# Altium PCB PCB2.PcbDoc
Units mm, origin at the board's own origin, x right, y up, seen from the top; angles counter-clockwise.
Board outline 83.06 x 84.33 mm, 2 copper layers (Top Layer, Bottom Layer); 15 components, 21 nets, 99 pads, 6 vias.
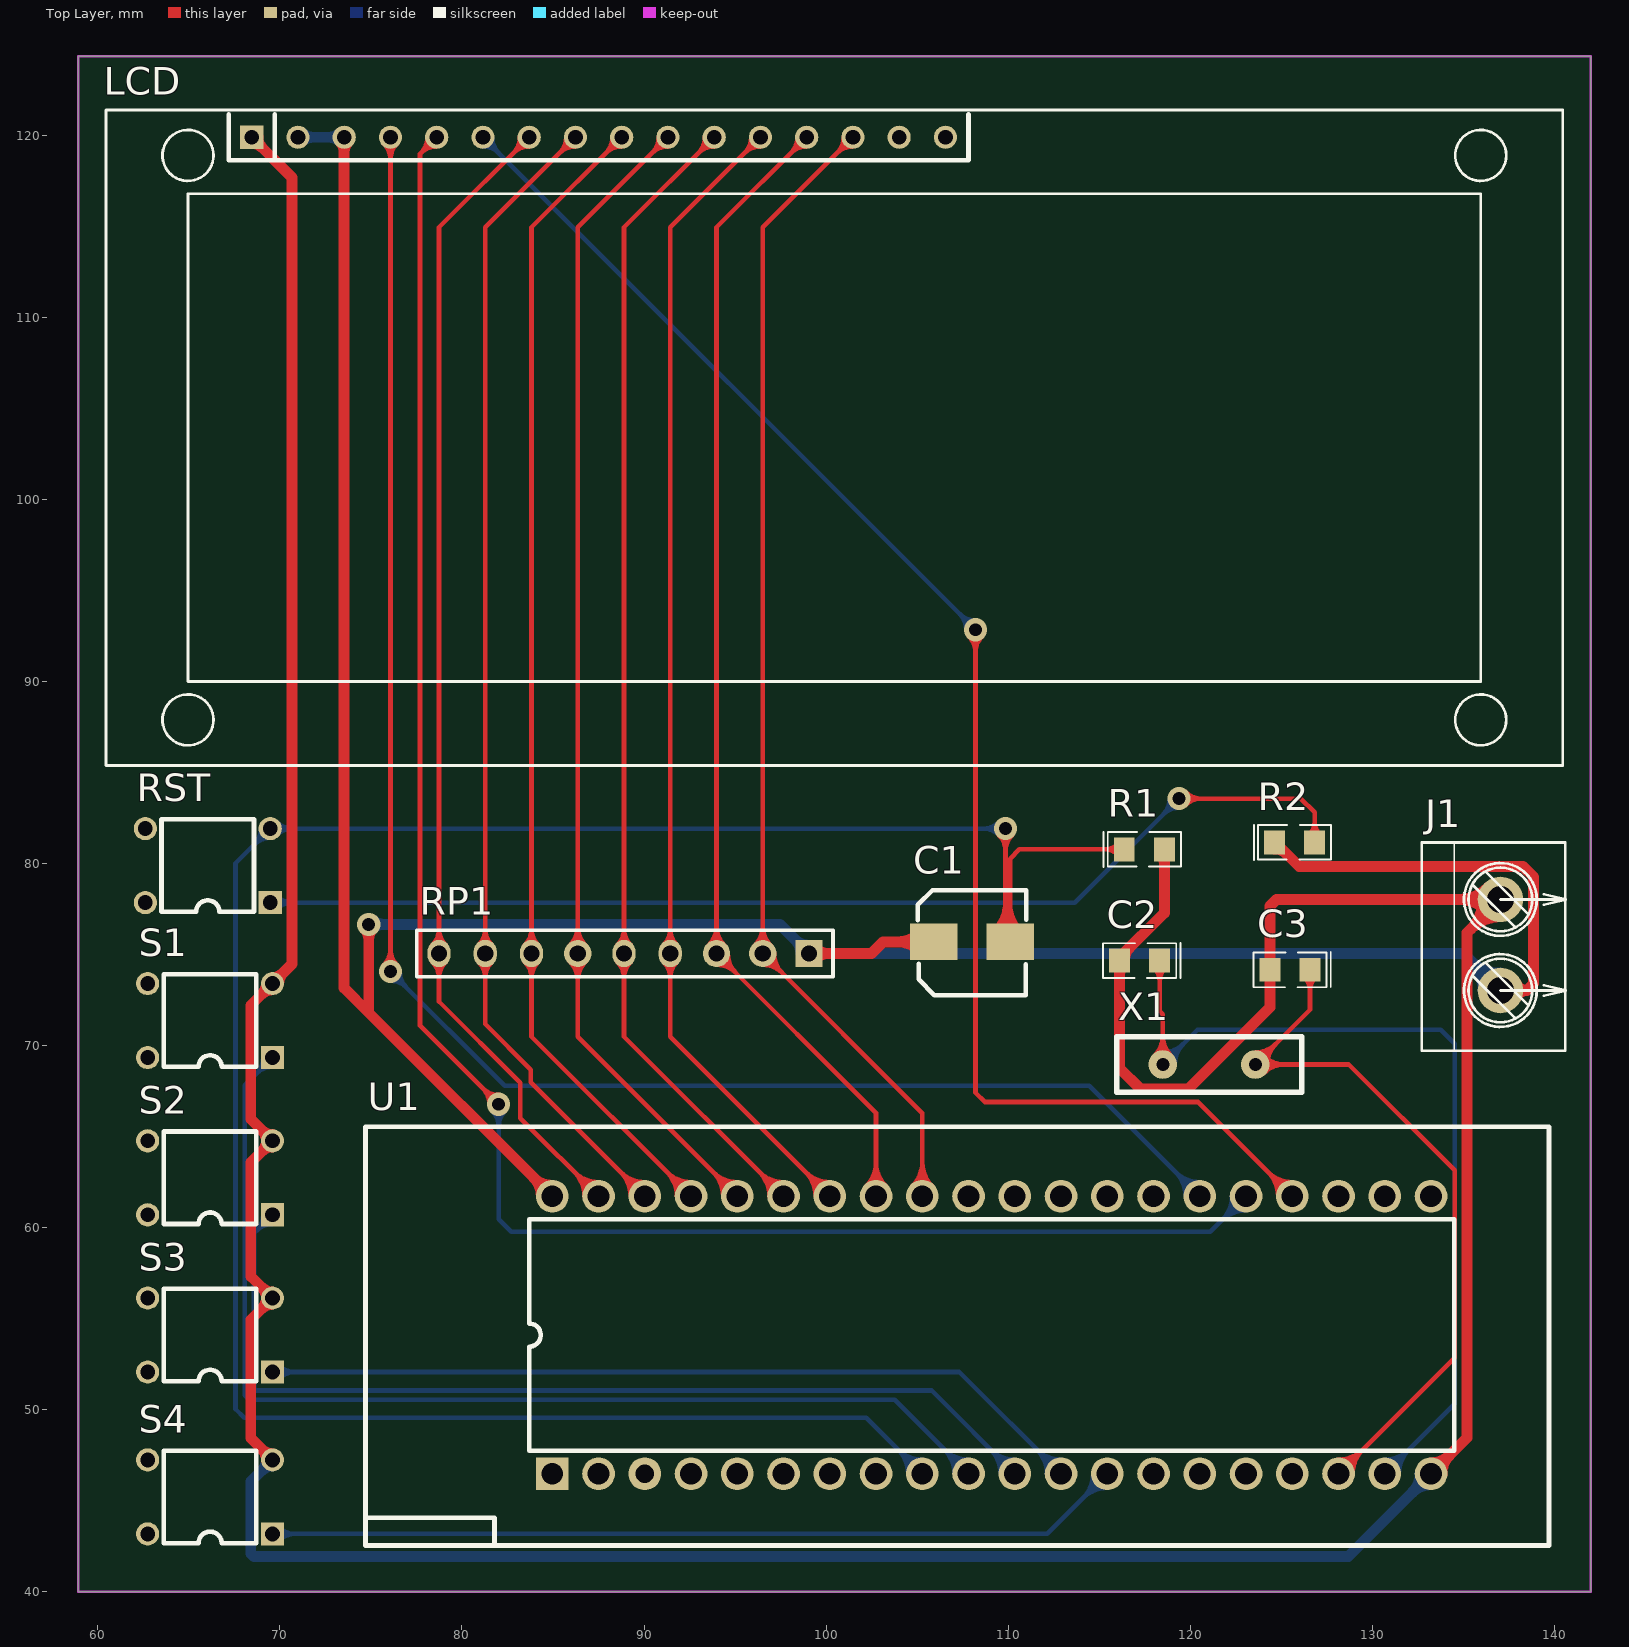
[diagram p0: Top Layer view]
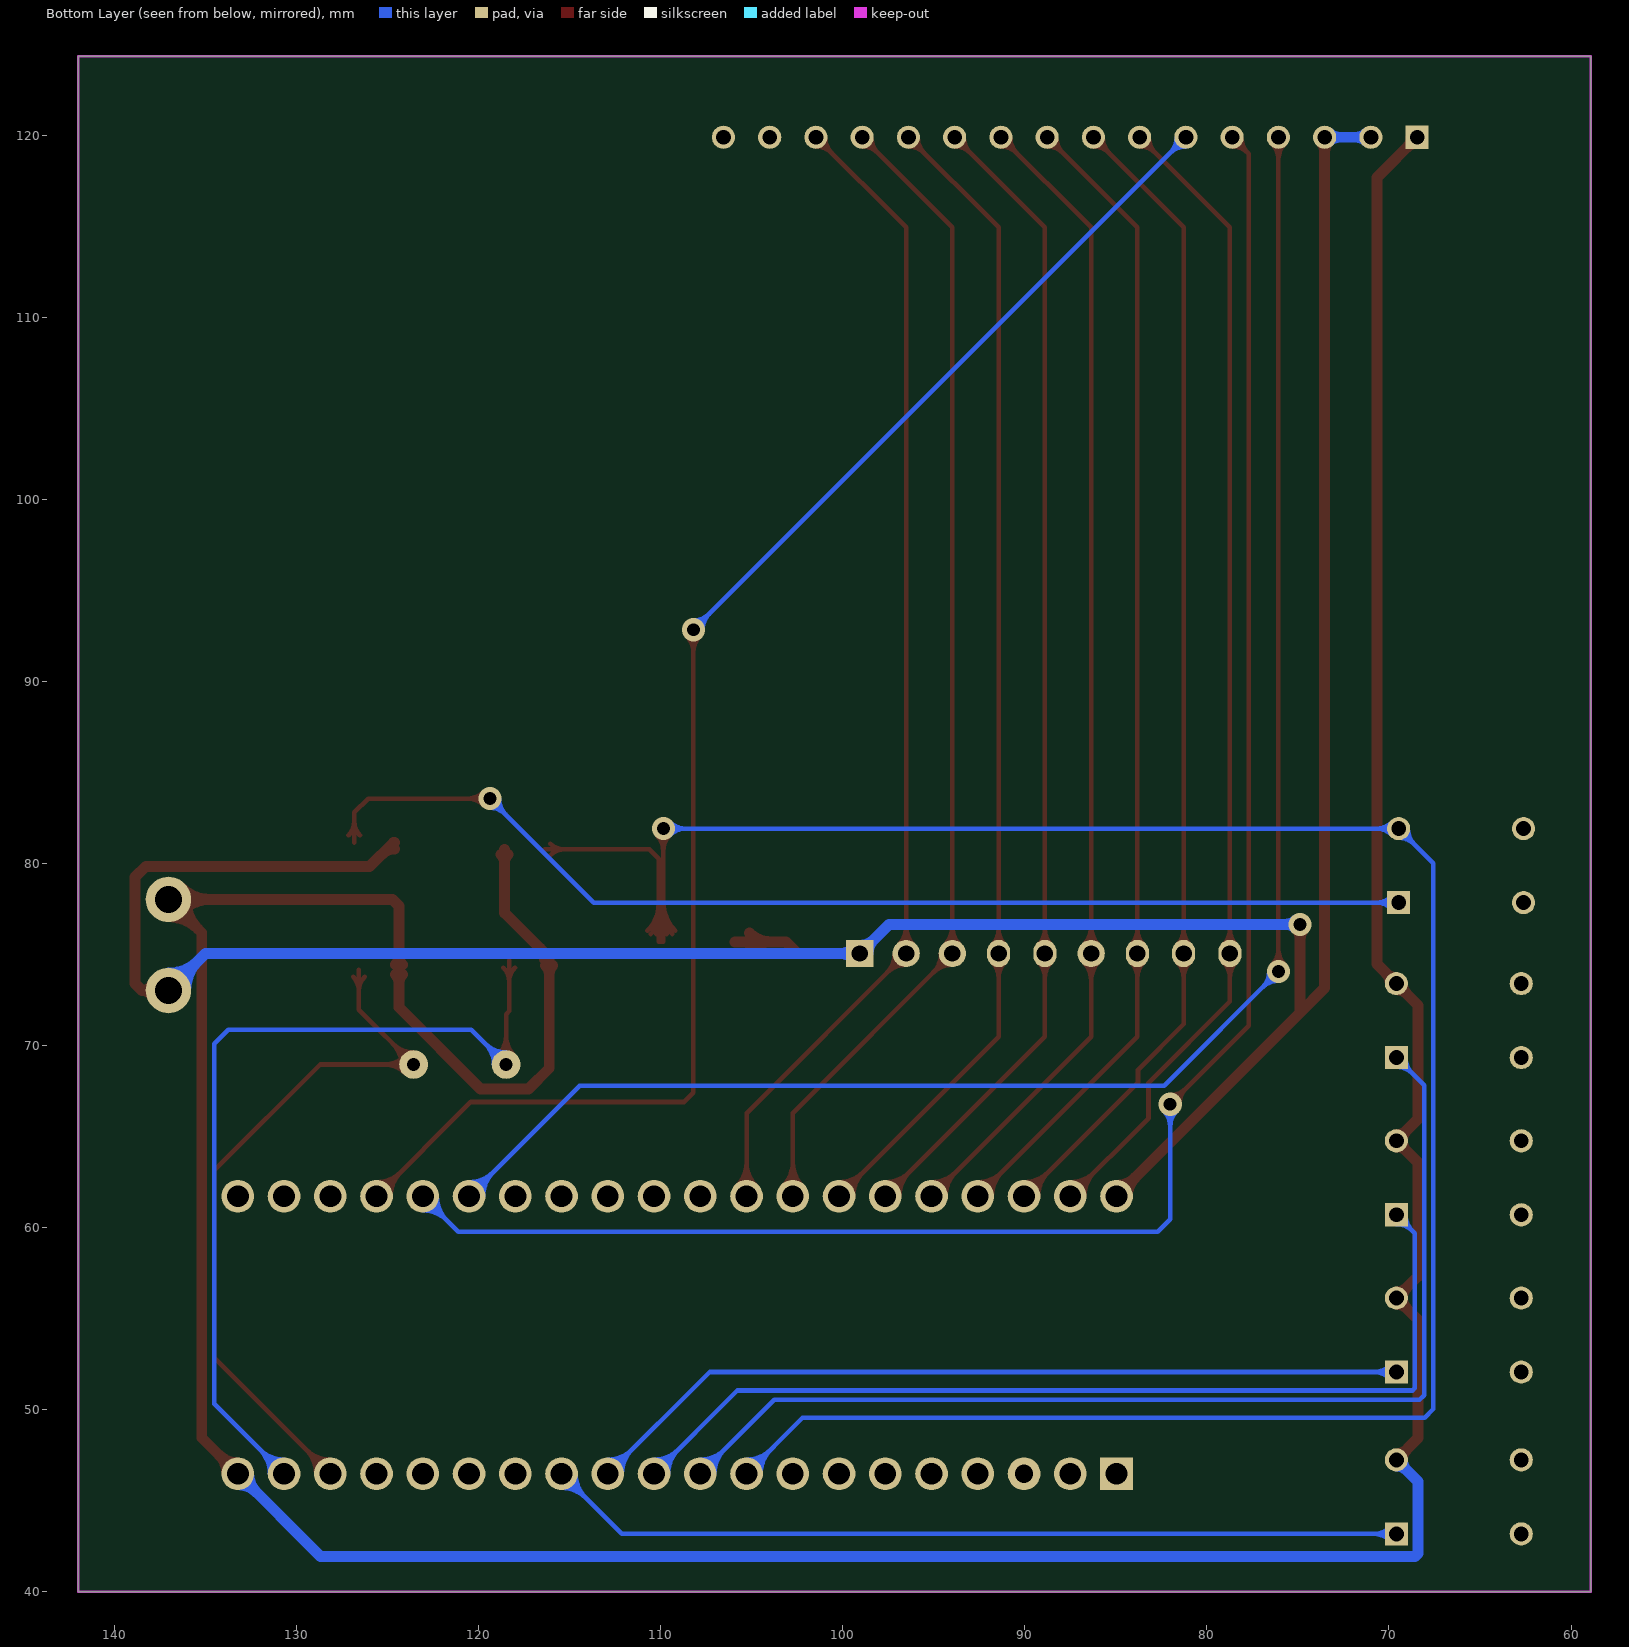
[diagram p1: Bottom Layer view, seen from below]
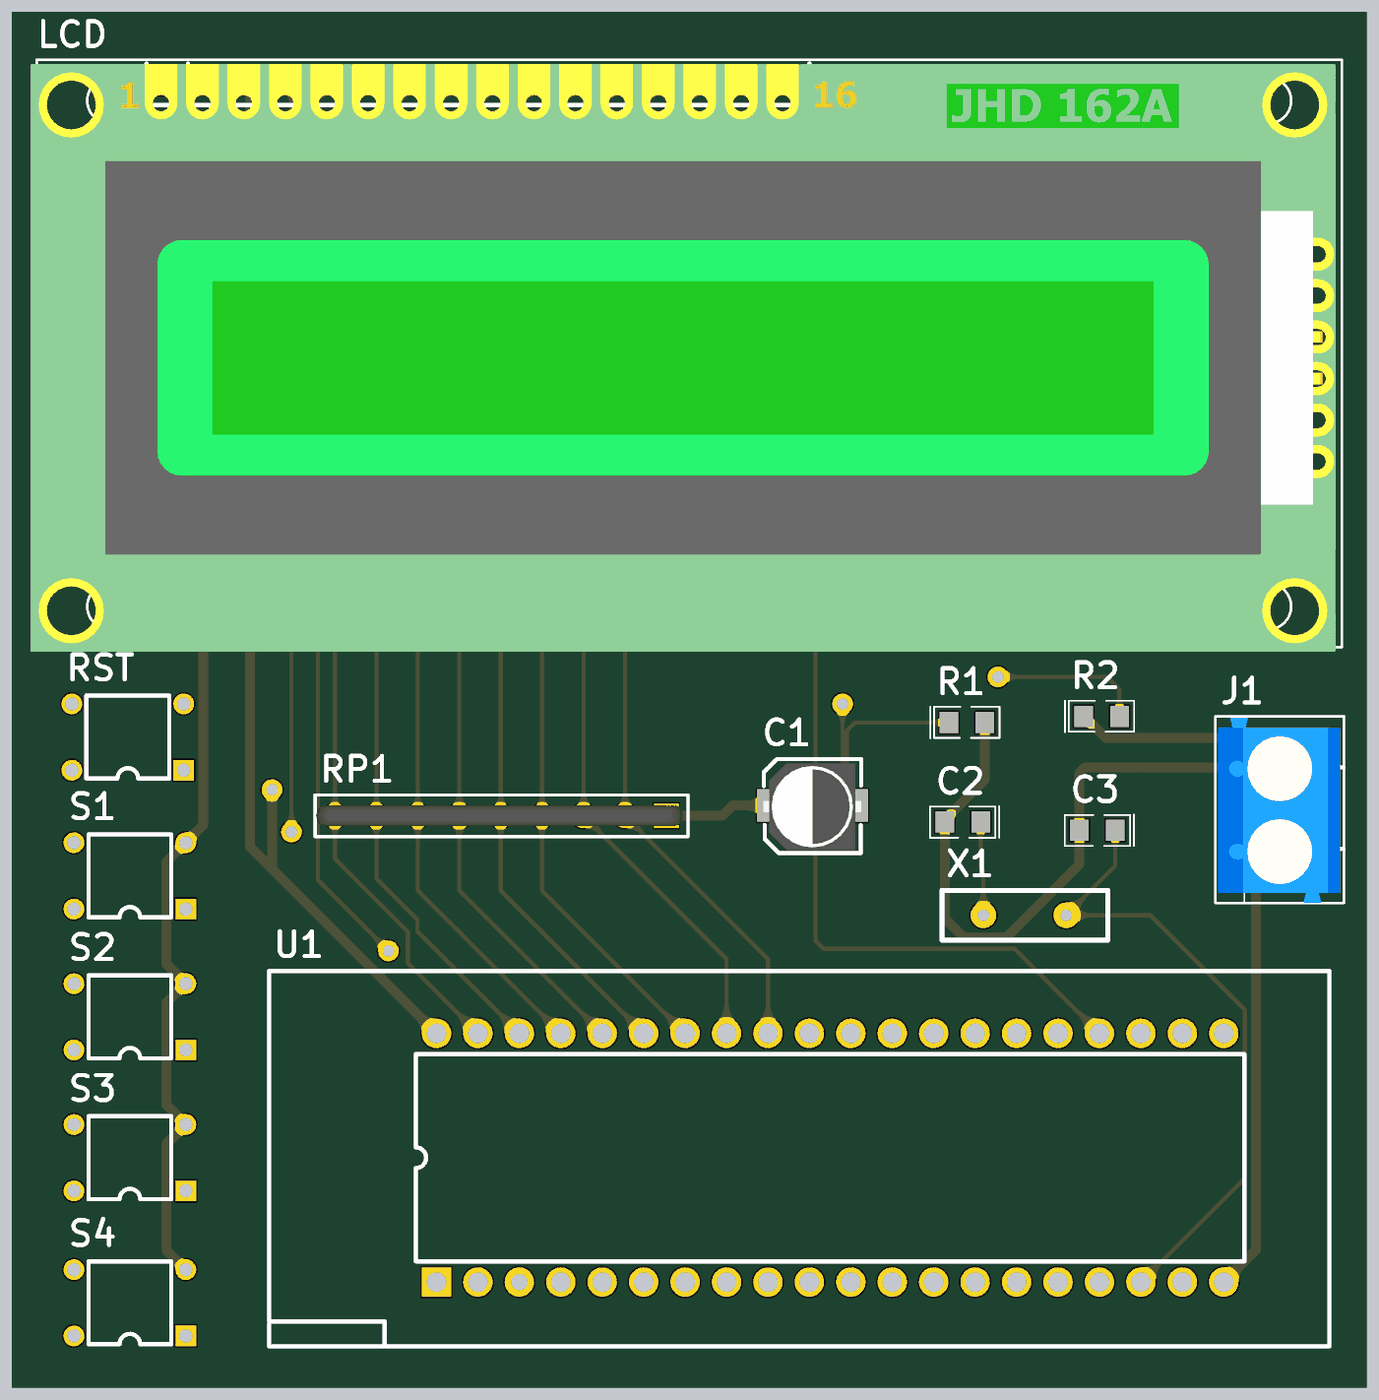
[diagram p2: 3D render of the assembled board from above, using the file's embedded part models]

## Layer stack, top to bottom
Top Solder: solder mask 0.0102, Solder Resist, Dk 3.5
Top Layer: signal copper 0.0356
Dielectric 1: dielectric 0.32, FR-4, Dk 4.8
Bottom Layer: signal copper 0.0356
Bottom Solder: solder mask 0.0102, Solder Resist, Dk 3.5

## Board outline
58.928,40.005 58.928,124.333 141.986,124.333 141.986,40.005

## Design rules (kind name [scope] priority, off if disabled: settings)
Clearance [All] p1: gap=0.254
PolygonConnect [All] p1: connectstyle=Relief reliefconductorwidth=0.254 reliefentries=4 polygonreliefangle="90 Angle" airgapwidth=0.254
RoutingVias [All] p1: holewidth=0.711 width=1.27 viastyle="Through Hole" minholewidth=0.711 minwidth=1.27 maxholewidth=0.711 maxwidth=1.27
SolderMaskExpansion [All] p1: expansion=0.102
Width Width_1 [InNetClass('New Class 1')] p1: maxlimit=0.254 minlimit=0.254 preferedwidth=0.254
Width [InNetClass('New Class')] p2: maxlimit=0.6 minlimit=0.254 preferedwidth=0.6
29 further rules are at their usual default settings.

## Classes and differential pairs
net class "New Class": GND VCC
net class "New Class 1": D0 D1 D2 D3 D4 D5 D6 D7 EN NetC1_2 NetC2_1 NetC3_1 NetR2_2 P30 P31 P32 P33 RS WR

## Components (designator, comment, footprint, x,y, rotation, side; value= is the part's Value field where it differs from the comment)
C1 "10uf" C_SMT-5*5 105.918,75.692 r0 top
C2 "30" C0805 117.221,74.676 r180 top
C3 "30" C0805 125.476,74.168 r180 top
J1 "CON2" TC2 137.033,73.025 r90 top
LCD "1602" LCD1602 68.453,119.888 r0 top
R1 "10K" C0805 117.475,80.772 r0 top
R2 "10K" C0805 125.73,81.153 r0 top
RP1 "103" R-9PIN 99.06,75.057 r180 top
RST "SW-PB" ANJIAN 66.04,77.343 r180 top
S1 "SW-PB" ANJIAN 66.167,68.834 r180 top
S2 "SW-PB" ANJIAN 66.167,60.198 r180 top
S3 "SW-PB" ANJIAN 66.167,51.562 r180 top
S4 "SW-PB" ANJIAN 66.167,42.672 r180 top
U1 "AT89C52" JINSUOZUO 139.7,42.545 r90 top
X1 "12MHz" XTAL1 118.491,68.961 r0 top

## Footprints (in the part's own frame and the unit in brackets; to place one, negate y for a bottom-side part, rotate by r counter-clockwise, add the part's x,y. Pads: shape width x height; smd on the part's side, far side on the other; paste and mask are expansions set on the pad)
ANJIAN [mil]
  rect 50x50 hole 32: 1(-135,-20)
  round 50 hole 32: 2(-135,-180) 3(135,-180) 4(135,-20)
  silkscreen extent -100,-200 100,0
C0805 [mm]
  rect 1.15x1.3 smd: 1(-1.1,0) 2(1.1,0)
  silkscreen extent -2.24,-0.97 2.01,0.97, body extent -0.97,-0.61 1.03,0.6, height 0.5
C_SMT-5*5 [mm] "贴片铝电解电容 5*5   22uf"
  rect 2.6x2 smd: 1(0,0) 2(4.191,0)
  silkscreen extent -0.89,-2.92 5.08,2.84, body extent -0.92,-2.73 5.08,2.57, height 5.9
JINSUOZUO [mm]
  rect 1.8x1.8 hole 1.2: 1(3.937,54.737)
  round 1.8 hole 1.2: 2(3.937,52.197) 4(3.937,47.117) 5(3.937,44.577) 6(3.937,42.037) 7(3.937,39.497) 8(3.937,36.957) 9(3.937,34.417) 10(3.937,31.877) 11(3.937,29.337) 12(3.937,26.797) 13(3.937,24.257) 14(3.937,21.717) 15(3.937,19.177) 16(3.937,16.637) 17(3.937,14.097) 18(3.937,11.557) 19(3.937,9.017) 20(3.937,6.477) 21(19.177,6.477) 22(19.177,9.017) 23(19.177,11.557) 24(19.177,14.097) 25(19.177,16.637) 26(19.177,19.177) 27(19.177,21.717) 28(19.177,24.257) 29(19.177,26.797) 30(19.177,29.337) 31(19.177,31.877) 32(19.177,34.417) 33(19.177,36.957) 34(19.177,39.497) 35(19.177,42.037) 36(19.177,44.577) 37(19.177,47.117) 38(19.177,49.657) 39(19.177,52.197) 40(19.177,54.737)
  round 1.8 hole 1: 3(3.937,49.657)
  silkscreen extent 0,0 23,65
LCD1602 [mil]
  rect 50x50 hole 32: 1(0,0)
  round 50 hole 32: 2(100,0) 3(200,0) 4(300,0) 5(400,0) 6(500,0) 7(600,0) 8(700,0) 9(800,0) 10(900,0) 11(1000,0) 12(1100,0) 13(1200,0) 14(1300,0) 15(1400,0) 16(1500,0)
  silkscreen extent -315,-1358 2835,59, body extent -330,-1369 2820,49, height 417
R-9PIN [mm]
  rect 1.5x1.5 hole 0.9: 1(0,0)
  round 1.5 hole 0.9: 2(2.54,0) 3(5.08,0) 6(12.7,0)
  oval 1.27x1.5 hole 0.9: 4(7.62,0) 5(10.16,0) 7(15.24,0) 8(17.78,0) 9(20.32,0)
  silkscreen extent -1.32,-1.27 21.54,1.27, body extent -1.01,-0.63 21.49,0.61, height 5.3
TC2 [mm] "2头接线端子（5.08）"
  round 2.5 hole 1.5: 1(0,0) 2(5,0)
  silkscreen extent -3.3,-3.59 8.13,4.32, body extent -3.31,-3.33 8.05,4.17, height 10.25
XTAL1 [mil]
  round 62 hole 28: 1(0,0) 2(200,0)
  silkscreen extent -100,-60 300,60

## Part data
C1: library part 电解电容, "Capacitor"
C2 C3: library part CAP, "Capacitor"
J1: "Connector"
LCD: library part LCM1602
R1 R2: library part RES2
RP1: library part RP8
U1: library part AT89C51, "8-Bit Microcontroller with 4K Flash ROM"
X1: library part CRYSTAL, "Crystal"

## Via types
v1: diameter 1.27, hole 0.711, Top Layer to Bottom Layer, 6 vias

## Nets (pads, with @x,y where several pads share a name; then routed paths per layer and width w, separated by ;. In a path a pad name is that pad's centre, name@x,y a point inside that pad or via, vN(x,y) a via of type N, cw(c..) or ccw(c..) an arc to the next point about the centre after c; other vN are vias at no path point)
D0: LCD.7 RP1.9 U1.39 | length 74.5
  Top Layer w0.254: RP1.9@78.381,74.583 cw(c77.514,73.716) 78.74,73.716 cw(c79.966,73.716) RP1.9@79.099,74.583 ; RP1.9@78.381,75.531 ccw(c77.514,76.398) 78.74,76.398 ccw(c79.966,76.398) RP1.9@79.099,75.531 ; LCD.7@83.185,119.888 cw(c81.959,119.888) 82.826,119.021 cw(c83.693,118.154) LCD.7@83.693,119.38 ; LCD.7 78.74,114.935 RP1.9 78.74,72.421 83.205,67.955 83.205,66.02 U1.39 ; U1.39@86.73,61.722 ccw(c84.864,61.722) 86.183,63.042 ccw(c87.503,64.361) U1.39@87.503,62.495 ; U1.39@86.984,61.722 ccw(c85.731,61.722) 86.617,62.608 ccw(c87.503,63.494) U1.39@87.503,62.241
D1: LCD.8 RP1.8 U1.38 | length 74.5
  Top Layer w0.254: RP1.8@80.921,74.583 cw(c80.054,73.716) 81.28,73.716 cw(c82.506,73.716) RP1.8@81.639,74.583 ; RP1.8@80.921,75.531 ccw(c80.054,76.398) 81.28,76.398 ccw(c82.506,76.398) RP1.8@81.639,75.531 ; LCD.8@85.725,119.888 cw(c84.499,119.888) 85.366,119.021 cw(c86.233,118.154) LCD.8@86.233,119.38 ; LCD.8 81.28,114.935 RP1.8 81.28,71.184 83.782,68.682 83.782,67.983 U1.38 ; U1.38@89.27,61.722 ccw(c87.404,61.722) 88.723,63.042 ccw(c90.043,64.361) U1.38@90.043,62.495 ; U1.38@89.524,61.722 ccw(c88.271,61.722) 89.157,62.608 ccw(c90.043,63.494) U1.38@90.043,62.241
D2: LCD.9 RP1.7 U1.37 | length 74.5
  Top Layer w0.254: RP1.7@83.461,74.583 cw(c82.594,73.716) 83.82,73.716 cw(c85.046,73.716) RP1.7@84.179,74.583 ; RP1.7@83.461,75.531 ccw(c82.594,76.398) 83.82,76.398 ccw(c85.046,76.398) RP1.7@84.179,75.531 ; LCD.9@88.265,119.888 cw(c87.039,119.888) 87.906,119.021 cw(c88.773,118.154) LCD.9@88.773,119.38 ; LCD.9 83.82,114.935 RP1.7 83.82,70.485 U1.37 ; U1.37@91.81,61.722 ccw(c89.944,61.722) 91.263,63.042 ccw(c92.583,64.361) U1.37@92.583,62.495 ; U1.37@92.064,61.722 ccw(c90.811,61.722) 91.697,62.608 ccw(c92.583,63.494) U1.37@92.583,62.241
D3: LCD.10 RP1.6 U1.36 | length 78.2
  Top Layer w0.254: RP1.6@85.919,74.616 cw(c84.856,73.553) 86.36,73.553 cw(c87.864,73.553) RP1.6@86.801,74.616 ; RP1.6@85.919,75.498 ccw(c84.856,76.561) 86.36,76.561 ccw(c87.864,76.561) RP1.6@86.801,75.498 ; RP1.6@86.099,74.796 cw(c85.469,74.166) 86.36,74.166 cw(c87.251,74.166) RP1.6@86.621,74.796 ; RP1.6@86.099,75.318 ccw(c85.469,75.948) 86.36,75.948 ccw(c87.251,75.948) RP1.6@86.621,75.318 ; LCD.10@90.805,119.888 cw(c89.579,119.888) 90.446,119.021 cw(c91.313,118.154) LCD.10@91.313,119.38 ; LCD.10 86.36,114.935 RP1.6 86.36,70.485 U1.36 ; U1.36@94.35,61.722 ccw(c92.484,61.722) 93.803,63.042 ccw(c95.123,64.361) U1.36@95.123,62.495 ; U1.36@94.604,61.722 ccw(c93.351,61.722) 94.237,62.608 ccw(c95.123,63.494) U1.36@95.123,62.241
D4: LCD.11 RP1.5 U1.35 | length 74.5
  Top Layer w0.254: RP1.5@88.541,74.583 cw(c87.674,73.716) 88.9,73.716 cw(c90.126,73.716) RP1.5@89.259,74.583 ; RP1.5@88.541,75.531 ccw(c87.674,76.398) 88.9,76.398 ccw(c90.126,76.398) RP1.5@89.259,75.531 ; LCD.11@93.345,119.888 cw(c92.119,119.888) 92.986,119.021 cw(c93.853,118.154) LCD.11@93.853,119.38 ; LCD.11 88.9,114.935 RP1.5 88.9,70.485 U1.35 ; U1.35@96.89,61.722 ccw(c95.024,61.722) 96.343,63.042 ccw(c97.663,64.361) U1.35@97.663,62.495 ; U1.35@97.144,61.722 ccw(c95.891,61.722) 96.777,62.608 ccw(c97.663,63.494) U1.35@97.663,62.241
D5: LCD.12 RP1.4 U1.34 | length 74.5
  Top Layer w0.254: RP1.4@91.081,74.583 cw(c90.214,73.716) 91.44,73.716 cw(c92.666,73.716) RP1.4@91.799,74.583 ; RP1.4@91.081,75.531 ccw(c90.214,76.398) 91.44,76.398 ccw(c92.666,76.398) RP1.4@91.799,75.531 ; LCD.12@95.885,119.888 cw(c94.659,119.888) 95.526,119.021 cw(c96.393,118.154) LCD.12@96.393,119.38 ; LCD.12 91.44,114.935 RP1.4 91.44,70.485 U1.34 ; U1.34@99.43,61.722 ccw(c97.564,61.722) 98.883,63.042 ccw(c100.203,64.361) U1.34@100.203,62.495 ; U1.34@99.684,61.722 ccw(c98.431,61.722) 99.317,62.608 ccw(c100.203,63.494) U1.34@100.203,62.241
D6: LCD.13 RP1.3 U1.33 | length 78.2
  Top Layer w0.254: RP1.3@93.539,75.498 ccw(c92.476,76.561) 93.98,76.561 ccw(c95.484,76.561) RP1.3@94.421,75.498 ; RP1.3@93.719,75.318 ccw(c93.089,75.948) 93.98,75.948 ccw(c94.871,75.948) RP1.3@94.241,75.318 ; RP1.3@93.98,74.434 cw(c93.98,72.93) 95.044,73.993 cw(c96.107,75.057) RP1.3@94.603,75.057 ; RP1.3@93.98,74.688 cw(c93.98,73.797) 94.61,74.427 cw(c95.24,75.057) RP1.3@94.349,75.057 ; LCD.13@98.425,119.888 cw(c97.199,119.888) 98.066,119.021 cw(c98.933,118.154) LCD.13@98.933,119.38 ; LCD.13 93.98,114.935 RP1.3 102.743,66.294 U1.33 ; U1.33@102.196,62.269 ccw(c100.877,63.588) 102.743,63.588 ccw(c104.609,63.588) U1.33@103.29,62.269 ; U1.33@102.376,62.089 ccw(c101.49,62.975) 102.743,62.975 ccw(c103.996,62.975) U1.33@103.11,62.089
D7: LCD.14 RP1.2 U1.32 | length 78.2
  Top Layer w0.254: RP1.2@96.079,75.498 ccw(c95.016,76.561) 96.52,76.561 ccw(c98.024,76.561) RP1.2@96.961,75.498 ; RP1.2@96.259,75.318 ccw(c95.629,75.948) 96.52,75.948 ccw(c97.411,75.948) RP1.2@96.781,75.318 ; RP1.2@96.52,74.434 cw(c96.52,72.93) 97.584,73.993 cw(c98.647,75.057) RP1.2@97.143,75.057 ; RP1.2@96.52,74.688 cw(c96.52,73.797) 97.15,74.427 cw(c97.78,75.057) RP1.2@96.889,75.057 ; LCD.14@100.965,119.888 cw(c99.739,119.888) 100.606,119.021 cw(c101.473,118.154) LCD.14@101.473,119.38 ; LCD.14 96.52,114.935 RP1.2 105.283,66.294 U1.32 ; U1.32@104.736,62.269 ccw(c103.417,63.588) 105.283,63.588 ccw(c107.149,63.588) U1.32@105.83,62.269 ; U1.32@104.916,62.089 ccw(c104.03,62.975) 105.283,62.975 ccw(c106.536,62.975) U1.32@105.65,62.089
EN: LCD.6 U1.24 | length 94.1
  Top Layer w0.254: v1@107.845,92.478 cw(c106.978,91.611) 108.204,91.611 cw(c109.43,91.611) v1@108.563,92.478 ; v1(108.204,92.837) 108.204,67.412 108.712,66.904 120.421,66.904 U1.24 ; U1.24@124.83,61.722 ccw(c122.964,61.722) 124.283,63.042 ccw(c125.603,64.361) U1.24@125.603,62.495 ; U1.24@125.084,61.722 ccw(c123.831,61.722) 124.717,62.608 ccw(c125.603,63.494) U1.24@125.603,62.241
  Bottom Layer w0.254: LCD.6@81.153,119.38 cw(c81.153,118.154) 82.02,119.021 cw(c82.887,119.888) LCD.6@81.661,119.888 ; LCD.6 v1(108.204,92.837) ; v1@107.696,92.837 ccw(c106.47,92.837) 107.337,93.704 ccw(c108.204,94.571) v1@108.204,93.345
GND: C2.2 C3.2 J1.2 LCD.1 R1.2 S1.2 S2.2 S3.2 S4.2 U1.20 | length 252.5
  Top Layer w0.6: LCD.1@68.453,119.553 cw(c68.453,118.744) 69.025,119.316 cw(c69.597,119.888) LCD.1@68.788,119.888 ; LCD.1 70.663,117.678 70.663,74.473 S1.2 68.402,72.212 68.402,65.964 S2.2 68.402,63.576 68.402,57.328 S3.2 68.402,54.94 68.402,48.438 S4.2 ; S4.2@69.261,47.244 ccw(c68.452,47.244) 69.024,47.816 ccw(c69.596,48.388) S4.2@69.596,47.579 ; S1.2@69.261,73.406 cw(c68.452,73.406) 69.024,72.834 cw(c69.596,72.262) S1.2@69.596,73.071 ; S3.2@69.596,55.799 ccw(c69.596,54.99) 69.024,55.562 ccw(c68.452,56.134) 69.261,56.134 ccw(c68.452,56.134) 69.024,56.706 ccw(c69.596,57.278) S3.2@69.596,56.469 ; S2.2@69.596,64.435 ccw(c69.596,63.626) 69.024,64.198 ccw(c68.452,64.77) 69.261,64.77 ccw(c68.452,64.77) 69.024,65.342 ccw(c69.596,65.914) S2.2@69.596,65.105 ; S1.2@69.596,73.741 ccw(c69.596,74.55) 70.168,73.978 ccw(c70.74,73.406) S1.2@69.931,73.406 ; C2.2@115.927,74.407 cw(c115.457,73.937) 116.121,73.937 cw(c116.785,73.937) C2.2@116.315,74.407 ; C2.2@116.396,74.751 cw(c117.27,74.751) 116.652,75.369 ; R1.2@118.381,80.503 cw(c117.911,80.033) 118.575,80.033 cw(c119.239,80.033) R1.2@118.769,80.503 ; R1.2 118.575,77.292 116.121,74.838 C2.2 116.121,68.758 117.264,67.615 119.888,67.615 124.376,72.103 C3.2 124.376,77.673 124.728,78.025 J1.2 135.204,76.196 135.204,48.463 U1.20 ; C3.2@124.182,73.899 cw(c123.712,73.429) 124.376,73.429 cw(c125.04,73.429) C3.2@124.57,73.899 ; C3.2@124.182,74.437 ccw(c123.712,74.907) 124.376,74.907 ccw(c125.04,74.907) C3.2@124.57,74.437 ; U1.20@133.223,47.082 ccw(c133.223,48.531) 134.247,47.506 ccw(c135.272,46.482) U1.20@133.823,46.482 ; J1.2@136.083,78.025 cw(c133.79,78.025) 135.411,76.403 cw(c137.033,74.781) J1.2@137.033,77.075 ; J1.2@136.361,77.353 ccw(c134.74,75.731) 134.74,78.025 ccw(c134.74,80.318) J1.2@136.361,78.697
  Bottom Layer w0.6: S4.2@69.261,47.244 cw(c68.452,47.244) 69.024,46.672 cw(c69.596,46.1) S4.2@69.596,46.909 ; S4.2 68.402,46.05 68.402,42.113 68.58,41.935 128.676,41.935 U1.20 ; U1.20@132.623,46.482 cw(c131.174,46.482) 132.199,45.458 cw(c133.223,44.433) U1.20@133.223,45.882
NetC1_2: C1.2 R1.1 RST.2 U1.9 | length 155.4
  Top Layer w0.254: C1.2@109.192,76.309 ccw(c107.59,77.911) 109.855,77.911 ; C1.2@109.371,76.13 ccw(c108.204,77.297) 109.855,77.297 ; C1.2@109.492,76.309 ccw(c108.001,77.8) 110.109,77.8 ccw(c112.217,77.8) C1.2@110.726,76.309 ; v1@109.496,81.556 cw(c108.629,80.689) 109.855,80.689 cw(c111.081,80.689) v1@110.214,81.556 ; C1.2@109.671,76.13 ccw(c108.615,77.186) 110.109,77.186 ccw(c111.603,77.186) C1.2@110.547,76.13 ; 109.855,77.075 ccw(c111.192,77.075) C1.2@110.247,76.13 ; 109.855,77.689 ccw(c111.806,77.689) C1.2@110.426,76.309 ; v1(109.855,81.915) 109.855,75.692 C1.2 110.109,80.264 110.617,80.772 R1.1 ; R1.1@116.058,80.455 ccw(c115.293,79.69) 115.293,80.772 ccw(c115.293,81.854) R1.1@116.058,81.089
  Bottom Layer w0.254: RST.2@68.961,81.915 cw(c67.735,81.915) 68.602,81.048 cw(c69.469,80.181) RST.2@69.469,81.407 ; RST.2@69.828,81.556 cw(c70.695,80.689) 70.695,81.915 cw(c70.695,83.141) RST.2@69.828,82.274 ; U1.9@104.51,46.482 ccw(c102.644,46.482) 103.963,47.802 ccw(c105.283,49.121) U1.9@105.283,47.255 ; U1.9@104.764,46.482 ccw(c103.511,46.482) 104.397,47.368 ccw(c105.283,48.254) U1.9@105.283,47.001 ; U1.9 102.21,49.555 68.047,49.555 67.564,50.038 67.564,80.01 RST.2 v1(109.855,81.915) ; v1@109.496,81.556 ccw(c108.629,80.689) 108.629,81.915 ccw(c108.629,83.141) v1@109.496,82.274
NetC2_1: C2.1 U1.19 X1.1 | length 62.8
  Top Layer w0.254: C2.1@118.004,74.284 cw(c117.239,73.519) 118.321,73.519 cw(c119.403,73.519) C2.1@118.638,74.284 ; X1.1@118.024,69.428 ccw(c116.897,70.555) 118.491,70.555 ccw(c120.085,70.555) X1.1@118.958,69.428 ; X1.1@118.204,69.248 ccw(c117.51,69.942) 118.491,69.942 ccw(c119.472,69.942) X1.1@118.778,69.248 ; C2.1 118.321,71.9 118.491,71.73 X1.1
  Bottom Layer w0.254: X1.1 120.396,70.866 133.756,70.866 134.518,70.104 134.518,50.317 U1.19 ; X1.1@118.491,69.367 ccw(c118.491,70.349) 119.185,69.655 ccw(c119.879,68.961) X1.1@118.897,68.961 ; X1.1@118.491,69.621 ccw(c118.491,71.216) 119.618,70.088 ccw(c120.746,68.961) X1.1@119.151,68.961 ; U1.19@130.683,47.001 ccw(c130.683,48.254) 131.569,47.368 ccw(c132.455,46.482) U1.19@131.202,46.482 ; U1.19@130.683,47.255 ccw(c130.683,49.121) 132.003,47.802 ccw(c133.322,46.482) U1.19@131.456,46.482
NetC3_1: C3.1 U1.18 X1.2 | length 53.8
  Top Layer w0.254: X1.2@123.571,69.367 ccw(c123.571,70.349) 124.265,69.655 ccw(c124.959,68.961) X1.2@123.977,68.961 ; X1.2@123.571,69.621 ccw(c123.571,71.216) 124.698,70.088 ccw(c125.826,68.961) X1.2@124.231,68.961 ; X1.2@123.858,68.674 cw(c124.552,67.98) 124.552,68.961 cw(c124.552,69.942) X1.2@123.858,69.248 ; X1.2@124.038,68.494 cw(c125.165,67.367) 125.165,68.961 cw(c125.165,70.555) X1.2@124.038,69.428 ; C3.1@126.259,73.776 cw(c125.494,73.011) 126.576,73.011 cw(c127.658,73.011) C3.1@126.893,73.776 ; C3.1 126.576,71.966 X1.2 128.702,68.961 134.518,63.144 134.518,52.857 U1.18 ; U1.18@128.143,47.001 ccw(c128.143,48.254) 129.029,47.368 ccw(c129.915,46.482) U1.18@128.662,46.482 ; U1.18@128.143,47.255 ccw(c128.143,49.121) 129.463,47.802 ccw(c130.782,46.482) U1.18@128.916,46.482
NetR2_2: R2.2 RST.1 | length 69.2
  Top Layer w0.254: v1(119.38,83.566) 126.068,83.566 126.83,82.804 R2.2 ; v1@119.739,83.207 cw(c120.606,82.34) 120.606,83.566 cw(c120.606,84.792) v1@119.739,83.925 ; R2.2@126.513,81.545 ccw(c125.748,82.31) 126.83,82.31 ccw(c127.912,82.31) R2.2@127.147,81.545
  Bottom Layer w0.254: RST.1 113.665,77.851 v1(119.38,83.566) ; RST.1@69.828,77.492 cw(c70.695,76.625) 70.695,77.851 cw(c70.695,79.077) RST.1@69.828,78.21 ; v1@118.872,83.566 cw(c117.646,83.566) 118.513,82.699 cw(c119.38,81.832) v1@119.38,83.058
P30: S1.1 U1.10 | length 67.5
  Bottom Layer w0.254: S1.1@69.088,69.342 cw(c67.862,69.342) 68.729,68.475 cw(c69.596,67.608) S1.1@69.596,68.834 ; S1.1 68.072,67.818 68.072,50.8 68.326,50.546 103.759,50.546 U1.10 ; U1.10@107.05,46.482 ccw(c105.184,46.482) 106.503,47.802 ccw(c107.823,49.121) U1.10@107.823,47.255 ; U1.10@107.304,46.482 ccw(c106.051,46.482) 106.937,47.368 ccw(c107.823,48.254) U1.10@107.823,47.001
P31: S2.1 U1.11 | length 60.5
  Bottom Layer w0.254: S2.1@69.088,60.706 cw(c67.862,60.706) 68.729,59.839 cw(c69.596,58.972) S2.1@69.596,60.198 ; S2.1 68.58,59.69 68.58,51.181 68.707,51.054 105.791,51.054 U1.11 ; U1.11@109.59,46.482 ccw(c107.724,46.482) 109.043,47.802 ccw(c110.363,49.121) U1.11@110.363,47.255 ; U1.11@109.844,46.482 ccw(c108.591,46.482) 109.477,47.368 ccw(c110.363,48.254) U1.11@110.363,47.001
P32: S3.1 U1.12 | length 52.4
  Bottom Layer w0.254: S3.1 107.315,52.07 U1.12 ; S3.1@69.955,51.711 cw(c70.822,50.844) 70.822,52.07 cw(c70.822,53.296) S3.1@69.955,52.429 ; U1.12@112.13,46.482 ccw(c110.264,46.482) 111.583,47.802 ccw(c112.903,49.121) U1.12@112.903,47.255 ; U1.12@112.384,46.482 ccw(c111.131,46.482) 112.017,47.368 ccw(c112.903,48.254) U1.12@112.903,47.001
P33: S4.1 U1.13 | length 54
  Bottom Layer w0.254: S4.1 112.141,43.18 U1.13 ; S4.1@69.955,42.821 cw(c70.822,41.954) 70.822,43.18 cw(c70.822,44.406) S4.1@69.955,43.539 ; U1.13@114.67,46.482 cw(c112.804,46.482) 114.123,45.162 cw(c115.443,43.843) U1.13@115.443,45.709 ; U1.13@114.924,46.482 cw(c113.671,46.482) 114.557,45.596 cw(c115.443,44.71) U1.13@115.443,45.963
RS: LCD.4 U1.26 | length 106.1
  Top Layer w0.254: v1@75.714,74.426 ccw(c74.847,75.293) 76.073,75.293 ccw(c77.299,75.293) v1@76.432,74.426 ; LCD.4@75.714,119.529 cw(c74.847,118.662) 76.073,118.662 cw(c77.299,118.662) LCD.4@76.432,119.529 ; v1(76.073,74.066) LCD.4
  Bottom Layer w0.254: v1@76.073,73.558 cw(c76.073,72.332) 76.94,73.199 cw(c77.807,74.066) v1@76.581,74.066 ; v1(76.073,74.066) 82.35,67.79 114.455,67.79 U1.26 ; U1.26@119.75,61.722 ccw(c117.884,61.722) 119.203,63.042 ccw(c120.523,64.361) U1.26@120.523,62.495 ; U1.26@120.004,61.722 ccw(c118.751,61.722) 119.637,62.608 ccw(c120.523,63.494) U1.26@120.523,62.241
VCC: C1.1 J1.1 LCD.2 LCD.3 R2.1 RP1.1 U1.40 | length 186.1
  Top Layer w0.6: LCD.3@73.296,119.651 cw(c72.724,119.079) 73.533,119.079 cw(c74.342,119.079) LCD.3@73.77,119.651 ; LCD.3 73.533,73.152 74.879,71.806 ; v1@74.642,76.42 cw(c74.07,75.848) 74.879,75.848 cw(c75.688,75.848) v1@75.116,76.42 ; v1(74.879,76.657) 74.879,71.806 ; U1.40@84.363,61.722 ccw(c82.914,61.722) 83.939,62.746 ccw(c84.963,63.771) U1.40@84.963,62.322 ; U1.40 74.879,71.806 ; RP1.1 102.489,75.057 103.124,75.692 C1.1 ; RP1.1@99.378,74.739 cw(c100.146,73.971) 100.146,75.057 cw(c100.146,76.143) RP1.1@99.378,75.375 ; C1.1@105.123,75.197 ccw(c103.928,74.002) 103.928,75.692 ccw(c103.928,77.382) C1.1@105.123,76.187 ; R2.1@124.63,80.803 cw(c124.63,79.878) 125.284,80.532 ; R2.1 124.663,81.153 125.984,79.832 138.278,79.832 138.862,79.248 138.862,73.406 138.481,73.025 ; J1.1 138.481,73.025 ; J1.1@137.905,72.647 cw(c138.481,72.397) 138.481,73.025 ; J1.1@137.905,73.403 ccw(c138.481,73.653) 138.481,73.025
  Bottom Layer w0.6: LCD.2 LCD.3 ; LCD.2@71.23,119.651 cw(c71.802,119.079) 71.802,119.888 cw(c71.802,120.697) LCD.2@71.23,120.125 ; LCD.3@73.296,119.651 ccw(c72.724,119.079) 72.724,119.888 ccw(c72.724,120.697) LCD.3@73.296,120.125 ; v1(74.879,76.657) 97.46,76.657 RP1.1 135.001,75.057 J1.1 ; v1@75.116,76.42 cw(c75.688,75.848) 75.688,76.657 cw(c75.688,77.466) v1@75.116,76.894 ; RP1.1@98.61,75.057 ccw(c97.524,75.057) 98.292,75.825 ccw(c99.06,76.593) RP1.1@99.06,75.507 ; RP1.1@99.378,74.739 cw(c100.146,73.971) 100.146,75.057 cw(c100.146,76.143) RP1.1@99.378,75.375 ; J1.1@136.083,73.025 ccw(c133.79,73.025) 135.411,74.647 ccw(c137.033,76.268) J1.1@137.033,73.975
WR: LCD.5 U1.25 | length 114.4
  Top Layer w0.254: LCD.5@78.105,119.888 cw(c76.879,119.888) 77.746,119.021 cw(c78.613,118.154) LCD.5@78.613,119.38 ; LCD.5 77.699,118.974 77.699,71.095 v1(82.017,66.777) ; v1@81.509,66.777 ccw(c80.282,66.777) 81.149,67.644 ccw(c82.017,68.511) v1@82.017,67.285
  Bottom Layer w0.254: v1@81.657,66.417 cw(c80.79,65.55) 82.017,65.55 cw(c83.243,65.55) v1@82.376,66.417 ; v1(82.017,66.777) 82.017,60.452 82.702,59.766 121.107,59.766 U1.25 ; U1.25@122.29,61.722 cw(c120.424,61.722) 121.743,60.402 cw(c123.063,59.083) U1.25@123.063,60.949 ; U1.25@122.544,61.722 cw(c121.291,61.722) 122.177,60.836 cw(c123.063,59.95) U1.25@123.063,61.203
pads on no net: LCD.15 LCD.16 RST.3 RST.4 S1.3 S1.4 S2.3 S2.4 S3.3 S3.4 S4.3 S4.4 U1.1 U1.2 U1.3 U1.4 U1.5 U1.6 U1.7 U1.8 U1.14 U1.15 U1.16 U1.17 U1.21 U1.22 U1.23 U1.27 U1.28 U1.29 U1.30 U1.31

## Keep-outs
Keep-Out Layer:
  the board outline again, w0.132